# EAGLE board JusticeSound1.1 (EAGLE 7.1.0)

Size 26 x 42 mm. Coordinates in mm from the lower left corner, seen from the top.
Outline: 26,0 26,42 0,42 0,0 26,0
Copper layers (1*16): Top 0.035mm / dielectric 1.5mm / Bottom 0.035mm
Design rules "ITEADstudio_DRC *": minimum track width 12mil, minimum drill 12mil, track to track 6mil, track to pad 6mil, pad to pad 6mil, via to via 6mil, smd to smd 0mil, copper to edge 10mil, drill to drill 10mil, minimum pad ring 10mil, minimum via ring 6mil, stop-mask expansion 2mil, vias tented up to drill 100mil, thermal gap 15mil
Net classes: 1 power: width 0.381 mm, clearance 0.254 mm
tRestrict: area 24.3,8.9 to 29.1,12.8; area 5.8,16.9 to 6.9,18.5; area 5.2,9.7 to 6.7,10.4
bRestrict: area 27.4,17.7 to 29.2,18.7; area 21.1,13.8 to 22.9,14.9; area 21.6,12.6 to 22.1,13.2; area 20.7,12.6 to 21.2,13.2; area 20.2,12.8 to 20.7,13.5; area 20.1,13.4 to 20.6,14; area 26.5,18.9 to 27.1,19.5; area 26.5,17.9 to 27.1,18.5; area 27.5,19.1 to 28,19.8; area 27.9,18.8 to 29.1,19.6

## Footprints (pad centres in the part's own frame; a part is rotated, then mirrored left to right if it is on the bottom)
CR1220-SMD = smd 3.2 x 3.2: +$1 -8.2,0; +$2 8.2,0 | smd 3.9 x 3.9: - 0,0
TURTLE-3PIN = smd 1.676 x 1: P$1 -2.39,-0.889; P$2 -2.39,0.811; P$3 2.36,-0.889; P$4 2.36,0.811 | hole 0.75: -0.015,-1; -0.015,1
0603-CAP = smd 1.016 x 0.965: 1 -0.85,0; 2 0.85,0
0402-CAP = smd 0.7 x 0.9: 1 -0.65,0; 2 0.65,0
MA03-2 = smd 2.159 x 2.159: 1 -2.54,-1.27; 2 -2.54,1.27; 3 0,-1.27; 4 0,1.27; 5 2.54,-1.27; 6 2.54,1.27
0603-LED = smd 0.8 x 0.9: MINUS -0.85,0; PLUS 0.85,0
0603-RES = smd 1.016 x 0.965: 1 -0.85,0; 2 0.85,0
0402-RES = smd 0.7 x 0.9: 1 -0.65,0; 2 0.65,0
SO14 = smd 0.6 x 1.2: 1 -3.81,-2.8; 2 -2.54,-2.8; 3 -1.27,-2.8; 4 0,-2.8; 5 1.27,-2.8; 6 2.54,-2.8; 7 3.81,-2.8; 8 3.81,2.8; 9 2.54,2.8; 10 1.27,2.8; 11 0,2.8; 12 -1.27,2.8; 13 -2.54,2.8; 14 -3.81,2.8
SOT23-5 = smd 0.55 x 1.2: 1 -0.95,-1.3; 2 0,-1.3; 3 0.95,-1.3; 4 0.95,1.3; 5 -0.95,1.3
ADMP401 = smd 0.9 x 0.9: 1 -1.2,2.62; 5 1.2,2.62; 6 0,2.62 | smd 0.7 x 0.7: 2 1.3,-0.8; 4 -1.3,-0.8 | hole 0.9: 0,0

## Placement (x,y rotation side)
BATT  CR1220  [CR1220-SMD]  13,8.5 180 top
BTN1  [TURTLE-3PIN]  1.5,33 90 top
C1  0.1  [0603-CAP]  10.5,27 0 top
C2  0.1uF  [0402-CAP]  16.5,26.5 270 top
C3  4.7uF  [0402-CAP]  19,26.5 270 top
C4  100pF  [0402-CAP]  21.5,26.5 270 top
C5  1.0uF  [0402-CAP]  24,26.5 270 top
ISP  [MA03-2]  21.5,39 180 top
LED1  LED0603  [0603-LED]  15,39 0 bottom
LED2  LED0603  [0603-LED]  11,39 0 bottom
LED3  LED0603  [0603-LED]  15,35 0 bottom
LED4  LED0603  [0603-LED]  11,35 0 bottom
LED5  LED0603  [0603-LED]  23,31 0 bottom
LED6  LED0603  [0603-LED]  19,31 0 bottom
LED7  LED0603  [0603-LED]  15,31 0 bottom
LED8  LED0603  [0603-LED]  11,31 0 bottom
LED9  LED0603  [0603-LED]  7,31 0 bottom
LED10  LED0603  [0603-LED]  3,31 0 bottom
LED11  LED0603  [0603-LED]  23,27 0 bottom
LED12  LED0603  [0603-LED]  19,27 0 bottom
LED13  LED0603  [0603-LED]  15,27 0 bottom
LED14  LED0603  [0603-LED]  11,27 0 bottom
LED15  LED0603  [0603-LED]  7,27 0 bottom
LED16  LED0603  [0603-LED]  3,27 0 bottom
LED17  LED0603  [0603-LED]  15,23 0 bottom
LED18  LED0603  [0603-LED]  11,23 0 bottom
LED19  LED0603  [0603-LED]  15,19 0 bottom
LED20  LED0603  [0603-LED]  11,19 0 bottom
LED21  LED0603  [0603-LED]  15,15 0 bottom
LED22  LED0603  [0603-LED]  11,15 0 bottom
LED23  LED0603  [0603-LED]  15,11 0 bottom
LED24  LED0603  [0603-LED]  11,11 0 bottom
LED25  LED0603  [0603-LED]  15,7 0 bottom
LED26  LED0603  [0603-LED]  11,7 0 bottom
LED27  LED0603  [0603-LED]  15,3 0 bottom
LED28  LED0603  [0603-LED]  11,3 0 bottom
R1  1k5  [0603-RES]  3.5,27 0 top
R2  1k5  [0603-RES]  3.5,25 0 top
R3  1k5  [0603-RES]  3.5,23 0 top
R4  1k5  [0603-RES]  3.5,21 0 top
R5  1k5  [0603-RES]  3.5,19 0 top
R6  1k5  [0603-RES]  3.5,17 0 top
R7  1.5K  [0402-RES]  16.5,23 270 top
R8  10K  [0402-RES]  19,23 270 top
R9  10K  [0402-RES]  21.5,23 270 top
R10  100K  [0402-RES]  24,23 270 top
U1  ATTINY84  [SO14]  10.5,21 270 top
U2  OPA344  [SOT23-5]  17,18.5 0 top
U3  ADMP401  [ADMP401]  23,18.5 90 top
U$3  [OSHW-LOGO-S]  23.17,3.21 90 top

## Library data of the parts
BATT = adafruit
BTN1 = Richards
C1 LED1-LED28 R1-R6 = LowPowerLab
C2-C5 R7-R10 U2 U3 = SparkFun
ISP = Richards; OC_FARNELL: unknown; OC_NEWARK: unknown
U1 = SparkFun-DigitalIC
U$3 = SparkFun-Aesthetics

## Nets
BTN: BTN1.P$2 BTN1.P$4 U1.5
C7N$1: C3.1 U3.1
GND [power]: BATT.- BTN1.P$1 BTN1.P$3 C1.2 C2.1 C5.2 ISP.6 R9.1 U1.14 U2.2 U3.2 U3.4 U3.6
L0: R1.2 U1.13
L1: R2.2 U1.12
L2: R3.2 U1.11
L3: R4.2 U1.10
L4: R5.2 U1.2
L5: R6.2 U1.3
MIC: C4.2 R10.1 U1.6 U2.1
MISO: ISP.1 U1.8
MOSI: ISP.4 U1.7
N$2: C4.1 R7.1 R10.2 U2.4
N$6: C3.2 R7.2
N$7: C5.1 R8.1 R9.2 U2.3
N$8: LED1.MINUS LED2.MINUS LED3.MINUS LED4.MINUS LED5.MINUS LED6.PLUS LED12.PLUS LED18.PLUS LED24.PLUS R6.1
N$12: LED2.PLUS LED8.PLUS LED14.PLUS LED20.PLUS LED21.MINUS LED22.MINUS LED23.MINUS LED24.MINUS LED25.MINUS LED26.PLUS R2.1
N$22: LED1.PLUS LED7.PLUS LED13.PLUS LED19.PLUS LED25.PLUS LED26.MINUS LED27.MINUS LED28.MINUS R1.1
N$32: LED5.PLUS LED6.MINUS LED7.MINUS LED8.MINUS LED9.MINUS LED10.MINUS LED11.PLUS LED17.PLUS LED23.PLUS R5.1
N$41: LED4.PLUS LED10.PLUS LED11.MINUS LED12.MINUS LED13.MINUS LED14.MINUS LED15.MINUS LED16.PLUS LED22.PLUS LED28.PLUS R4.1
N$50: LED3.PLUS LED9.PLUS LED15.PLUS LED16.MINUS LED17.MINUS LED18.MINUS LED19.MINUS LED20.MINUS LED21.PLUS LED27.PLUS R3.1
RST: ISP.5 U1.4
SCK: ISP.3 U1.9
VCC: BATT.+$1 C1.1 C2.2 ISP.2 R8.2 U1.1 U2.5 U3.5

## Tracks (layer width: path | path; a pad name or v marks a point on that pad's centre or on a via)
BTN  (2 unrouted)
C7N$1  (1 unrouted)
GND  (12 unrouted)
L0  (1 unrouted)
L1  (1 unrouted)
L2  (1 unrouted)
L3  (1 unrouted)
L4  (1 unrouted)
L5  (1 unrouted)
MIC  (3 unrouted)
MISO  (1 unrouted)
MOSI  (1 unrouted)
N$2  (3 unrouted)
N$6  (1 unrouted)
N$7  (3 unrouted)
N$8  (9 unrouted)
N$12  (10 unrouted)
N$22  (8 unrouted)
N$32  (9 unrouted)
N$41  (10 unrouted)
N$50  (10 unrouted)
RST  (1 unrouted)
SCK  (1 unrouted)
VCC  (7 unrouted)

## Text on the board
tNames: Richard Hawthorn / Justice Cross | JusticeSound1.1 / Aug 2015
tDocu: REG